# EAGLE board SCHEMA0529 (EAGLE 9.6.2)
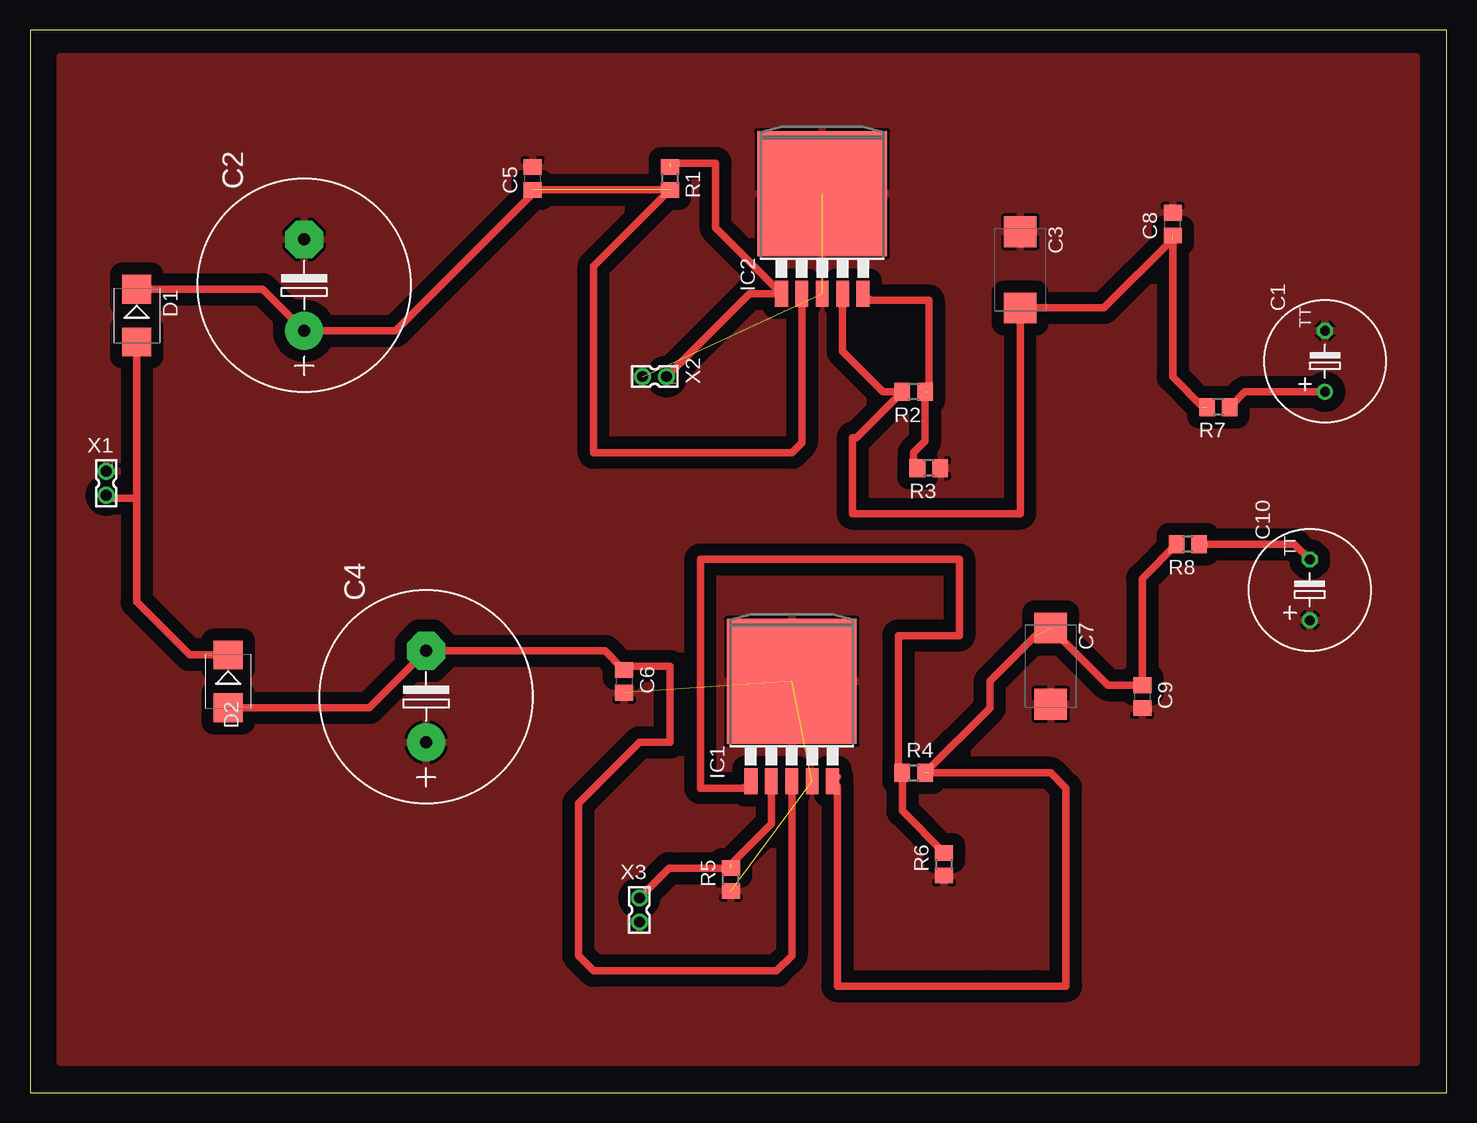
[diagram p0: board, top side]

Size 118.09 x 88.57 mm. Coordinates in mm from the lower left corner, seen from the top.
Outline: 0,0 118.09,0 118.09,88.57 0,88.57 0,0
Copper layers (1*16): Top 0.035mm / dielectric 1.5mm / Bottom 0.035mm
Design rules "default": minimum track width 6mil, minimum drill 0.35mm, track to track 6mil, track to pad 6mil, pad to pad 6mil, via to via 6mil, smd to smd 6mil, copper to edge 40mil, drill to drill 6mil, minimum pad ring 10mil, minimum via ring 8mil, stop-mask expansion 4mil, vias tented up to drill 0mil, thermal gap 10mil
Net classes: 1 New Class: width 0.635 mm

## Footprints (pad centres in the part's own frame; a part is rotated, then mirrored left to right if it is on the bottom)
TT5D10 = drill 0.813: + -2.54,0 | drill 0.813 octagon: - 2.54,0
E7,5-18 = drill 1.016 pad 3.15: + -3.81,0 | drill 1.016 pad 3.15 octagon: - 3.81,0
D/7343-31R = smd 2.55 x 2.7: + 3.175,0; - -3.175,0
C0805 = smd 1.3 x 1.5: 1 -0.95,0; 2 0.95,0
SMB = smd 2.4 x 2.4: A 2.2,0; C -2.2,0
TO263-5 = smd 1.067 x 2.159: 1 -3.404,-5.791; 2 -1.702,-5.791; 3 0,-5.791; 4 1.702,-5.791; 5 3.404,-5.791 | smd 10.8 x 10.41: 6 0,2.54
R0805 = smd 1.3 x 1.5: 1 -0.95,0; 2 0.95,0
87758-0216 = drill 0.9 pad 1.27: 1 0,-1; 2 0,1

## Placement (x,y rotation side)
C1  [TT5D10]  107.95,60.96 90 top
C2  [E7,5-18]  22.86,67.31 90 top
C3  [D/7343-31R]  82.55,68.58 270 top
C4  [E7,5-18]  33.02,33.02 90 top
C5  [C0805]  41.91,76.2 90 top
C6  [C0805]  49.53,34.29 270 top
C7  [D/7343-31R]  85.09,35.56 270 top
C8  [C0805]  95.25,72.39 90 top
C9  [C0805]  92.71,33.02 270 top
C10  [TT5D10]  106.68,41.91 90 top
D1  [SMB]  8.89,64.77 270 top
D2  [SMB]  16.51,34.29 270 top
IC1  [TO263-5]  63.5,31.75 0 top
IC2  [TO263-5]  66.04,72.39 0 top
R1  [R0805]  53.34,76.2 270 top
R2  [R0805]  73.66,58.42 180 top
R3  [R0805]  74.93,52.07 180 top
R4  [R0805]  73.66,26.67 0 top
R5  [R0805]  58.42,17.78 90 top
R6  [R0805]  76.2,19.05 90 top
R7  [R0805]  99.06,57.15 180 top
R8  [R0805]  96.52,45.72 180 top
X1  87758-0216  [87758-0216]  6.35,50.8 180 top
X2  87758-0216  [87758-0216]  52.07,59.69 90 top
X3  87758-0216  [87758-0216]  50.8,15.24 180 top

## Library data of the parts
C1-C10 = rcl; SPICEPREFIX: C
D1 D2 = diode
IC1 IC2 = linear
R1-R8 = rcl; SPICEPREFIX: R
X1-X3 = con-molex; MF: MOLEX; MPN: 87758-0216; OC_FARNELL: unknown; OC_NEWARK: 94M1513

## Nets
GND [New Class]: C1.- C2.- C3.- C4.+ C5.2 C6.2 C7.+ C8.2 C9.2 C10.+ IC1.4 IC1.6 IC2.3 IC2.6 R3.1 R5.1 R6.1 X1.1 X2.2 X3.2
N$1 [New Class]: D1.A D2.C X1.2
N$2 [New Class]: C2.+ C5.1 D1.C IC2.2 R1.2
N$3 [New Class]: C4.- C6.1 D2.A IC1.3
N$4 [New Class]: IC2.1 R1.1 X2.1
N$6 [New Class]: C3.+ C8.1 IC2.4 R2.2 R7.2
N$7 [New Class]: IC2.5 R2.1 R3.2
N$8 [New Class]: C7.- C9.1 IC1.5 R4.2 R8.2
N$10 [New Class]: IC1.1 R4.1 R6.2
N$11 [New Class]: IC1.2 R5.2 X3.1
N$16 [New Class]: C1.+ R7.1
N$17 [New Class]: C10.- R8.1

## Tracks (layer width: path | path; a pad name or v marks a point on that pad's centre or on a via)
GND  (5 unrouted)
  pour Top (isolate 1.016): 2.54,86.36 2.54,2.54 115.57,2.54 115.57,86.36
N$1
  Top 0.635: D2.C 13.31,36.49 8.89,40.91 8.89,49.53 | D1.A 8.89,49.53 | X1.2 6.62,49.53 8.89,49.53
N$2  (1 unrouted)
  Top 0.635: D1.C 19.39,66.97 C2.+ 30.48,63.5 42.23,75.25 R1.2 46.99,68.9 46.99,53.34 63.5,53.34 64.34,54.18 IC2.2
N$3
  Top 0.635: D2.A 28.28,32.09 C4.- 47.94,36.83 49.37,35.4 | 49.37,35.4 C6.1 | IC1.3 63.5,11.43 62.23,10.16 46.99,10.16 45.72,11.43 45.72,24.13 50.8,29.21 53.34,29.21 53.34,35.56 49.53,35.56 49.37,35.4
N$4  (1 unrouted)
  Top 0.635: 53.34,77.47 57.15,77.47 57.15,72.09 IC2.1 59.98,66.6 X2.1
N$6  (2 unrouted)
  Top 0.635: IC2.4 67.74,61.8 71.12,58.42 R2.2 68.9,54.61 68.58,54.61 68.58,48.26 82.55,48.26 C3.+ 89.53,65.41 95.25,71.12 | C8.1 95.25,59.69 97.79,57.15
N$7  (1 unrouted)
  Top 0.635: IC2.5 70,66.04 74.93,66.04 74.93,58.42 | R2.1 74.61,54.29 73.66,53.34 73.66,52.39 R3.2
N$8  (2 unrouted)
  Top 0.635: R8.2 92.71,42.86 C9.1 89.85,33.97 C7.- | 67.29,26.35 IC1.5 67.31,25.55 67.31,8.89 80.01,8.89 83.82,8.89 86.36,8.89 86.36,25.4 85.09,26.67 74.93,26.67 | R4.2 80.01,32.07 80.01,34.29 83.82,38.1
N$10
  Top 0.635: IC1.1 59.54,25.4 55.88,25.4 55.88,44.45 77.47,44.45 77.47,38.1 72.39,38.1 72.39,26.99 R4.1 72.71,23.49 R6.2
N$11  (1 unrouted)
  Top 0.635: IC1.2 61.8,22.43 58.42,19.05 | X3.1 53.29,18.73 R5.2
N$16
  Top 0.635: R7.1 101.28,58.42 C1.+
N$17
  Top 0.635: R8.1 105.41,45.72 C10.-